# EAGLE board ultraino3 (EAGLE 8.3.2)
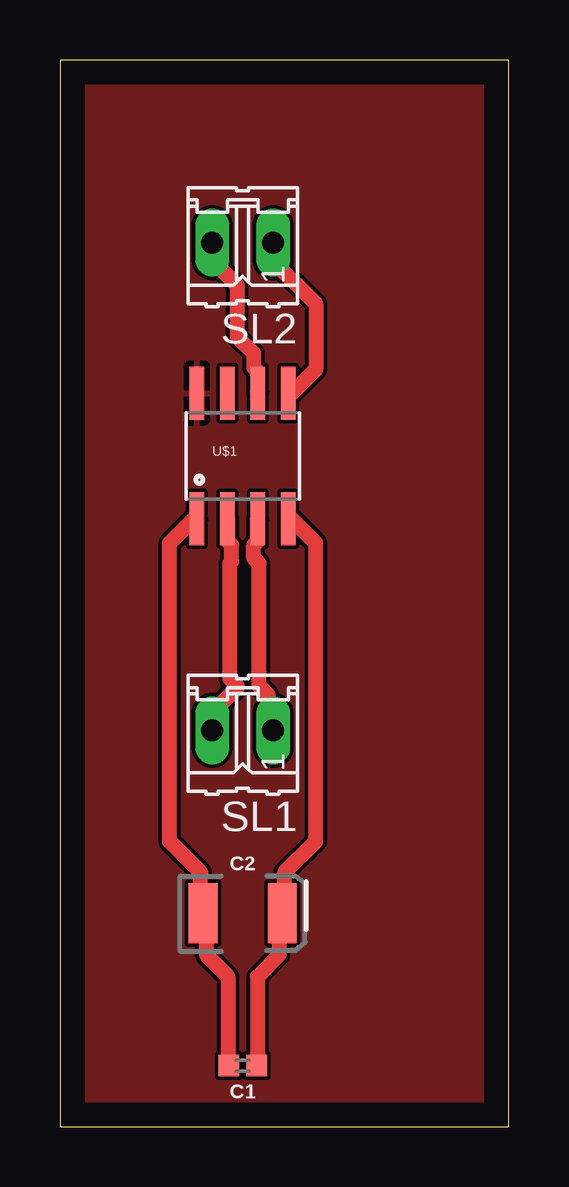
[diagram p0: board, top side]

Size 18.72 x 44.44 mm. Coordinates in mm from the lower left corner, seen from the top.
Outline: 0,0 18.72,0 18.72,44.44 0,44.44 0,0
Copper layers (1*16): Top 0.035mm / dielectric 1.5mm / Bottom 0.035mm
Design rules "default": minimum track width 6mil, minimum drill 0.35mm, track to track 6mil, track to pad 6mil, pad to pad 6mil, via to via 6mil, smd to smd 6mil, copper to edge 40mil, drill to drill 6mil, minimum pad ring 10mil, minimum via ring 8mil, stop-mask expansion 4mil, vias tented up to drill 0mil, thermal gap 10mil
Net classes: 1 GND: width 0.635 mm

## Footprints (pad centres in the part's own frame; a part is rotated, then mirrored left to right if it is on the bottom)
0402 = smd 0.85 x 0.9: 1 -0.58,0; 2 0.58,0
EIA3528 = smd 1.2 x 2.5: A 1.65,0; C -1.65,0
02P = drill 0.914 long: 1 -1.27,0; 2 1.27,0
SOIC-8 = smd 0.61 x 2.21: 1 -1.905,-2.616; 2 -0.635,-2.616; 3 0.635,-2.616; 4 1.905,-2.616; 5 1.905,2.616; 6 0.635,2.616; 7 -0.635,2.616; 8 -1.905,2.616

## Placement (x,y rotation side)
C1  0.1uF  [0402]  7.62,2.54 180 top
C2  47uF  [EIA3528]  7.62,8.89 0 top
SL1  [02P]  7.62,16.51 180 top
SL2  [02P]  7.62,36.83 180 top
U$1  TC4427  [SOIC-8]  7.62,27.94 0 top

## Library data of the parts
C1 = capacitor; PROD_ID: CAP-12416
C2 = capacitor; PROD_ID: CAP-08310
SL1 SL2 = con-amp-quick; OC_FARNELL: unknown; OC_NEWARK: unknown
U$1 = example

## Nets
GND: U$1.8
N$1 [GND]: SL1.2 U$1.2
N$2 [GND]: SL1.1 U$1.3
N$3 [GND]: SL2.1 U$1.5
N$4 [GND]: SL2.2 U$1.6
PE [GND]: C1.1 C2.A U$1.4
VCC [GND]: C1.2 C2.C U$1.1

## Tracks (layer width: path | path; a pad name or v marks a point on that pad's centre or on a via)
GND
  pour Top: 0,45.72 19.05,45.72 20.32,44.45 20.32,0 19.05,-1.27 0,-1.27 -1.27,0 -1.27,44.45
N$1
  Top 0.635: U$1.2 7.01,25.3 7.01,24.38 7.16,24.23 7.16,23.55 7.09,23.47 7.09,18.67 7.39,18.36 7.39,18.29 6.4,17.3 6.4,16.54 SL1.2
N$2
  Top 0.635: U$1.3 8.23,25.3 8.23,24.38 8.08,24.23 8.08,23.7 8.31,23.47 8.31,18.36 8.69,17.98 8.69,17.68 8.84,17.53 8.84,16.54 SL1.1
N$3
  Top 0.635: U$1.5 9.68,30.56 10.67,31.55 10.67,34.29 8.91,36.04 8.91,36.8 SL2.1
N$4
  Top 0.635: U$1.6 8.23,30.56 8.23,31.47 8.08,31.62 8.08,32.23 7.39,32.92 7.39,35.05 6.4,36.04 6.4,36.8 SL2.2
PE
  Top 0.635: C1.1 8.23,2.59 8.23,6.25 9.14,7.16 9.14,8.76 9.22,8.84 C2.A 9.37,9.14 9.37,10.59 10.67,11.89 10.67,24.31 9.68,25.3 9.53,25.3 U$1.4
VCC
  Top 0.635: C1.2 7.01,2.59 7.01,6.25 6.1,7.16 6.1,8.76 6.02,8.84 C2.C 5.87,9.14 5.87,10.59 4.57,11.89 4.57,24.31 5.56,25.3 5.71,25.3 U$1.1